# EAGLE board TubeClockBooster1.2 (EAGLE 6.4)
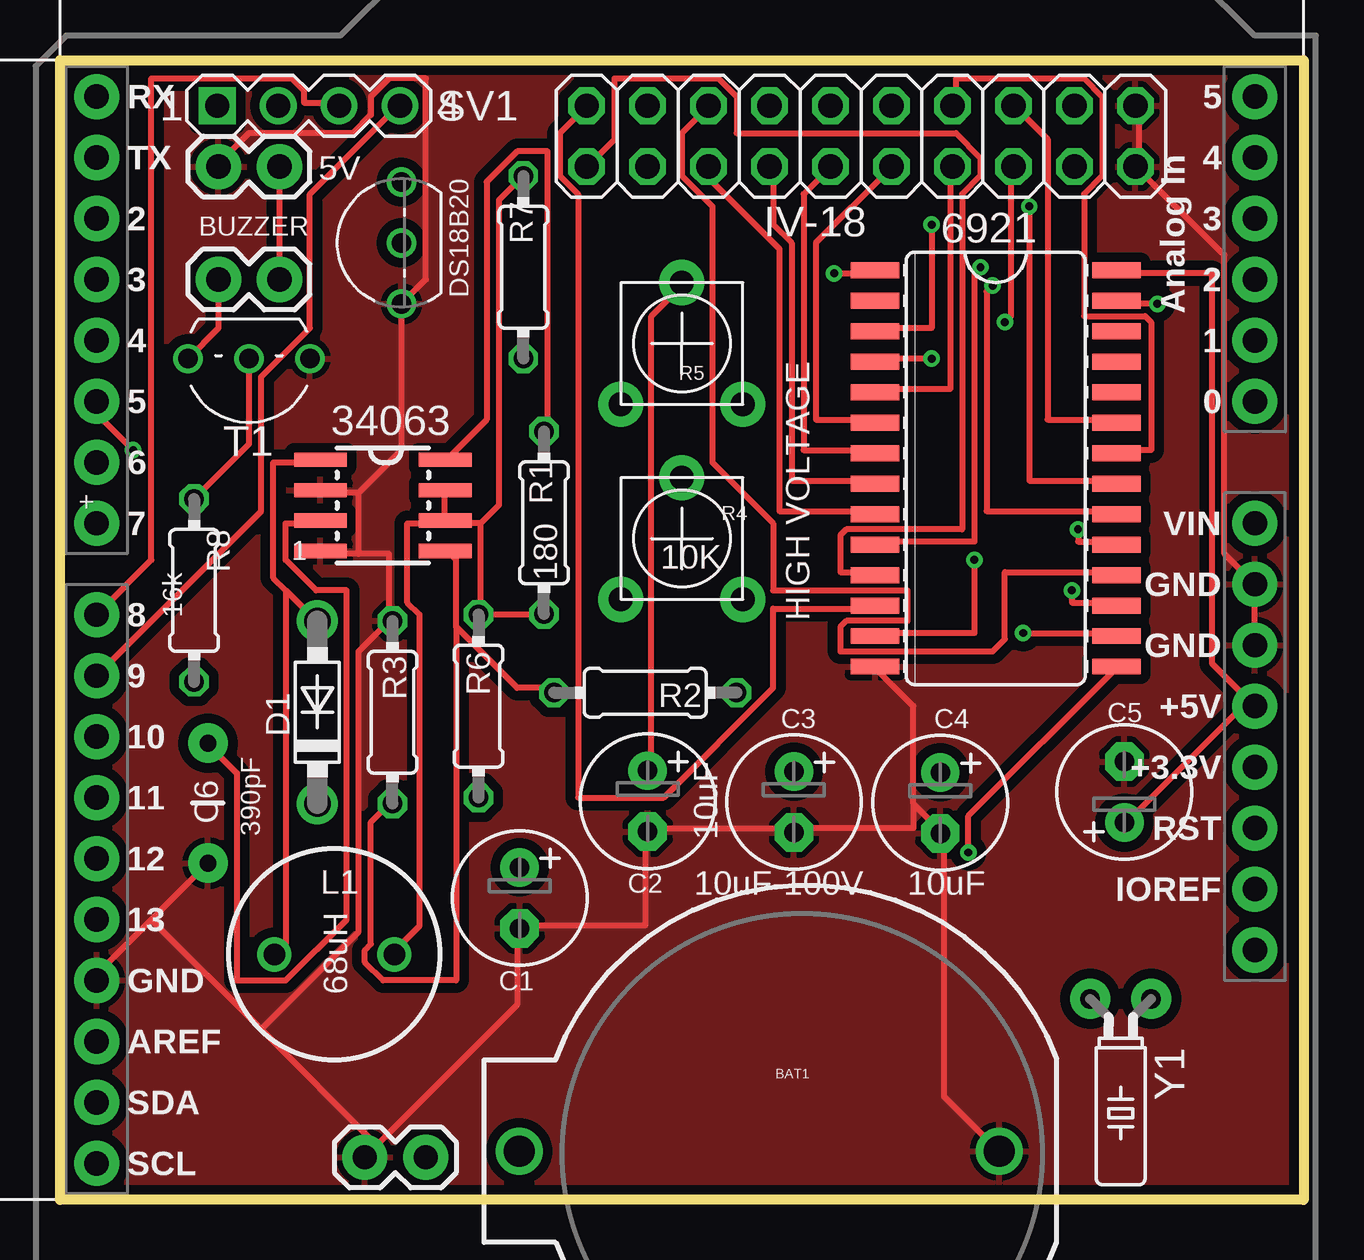
[diagram p0: board, top side]
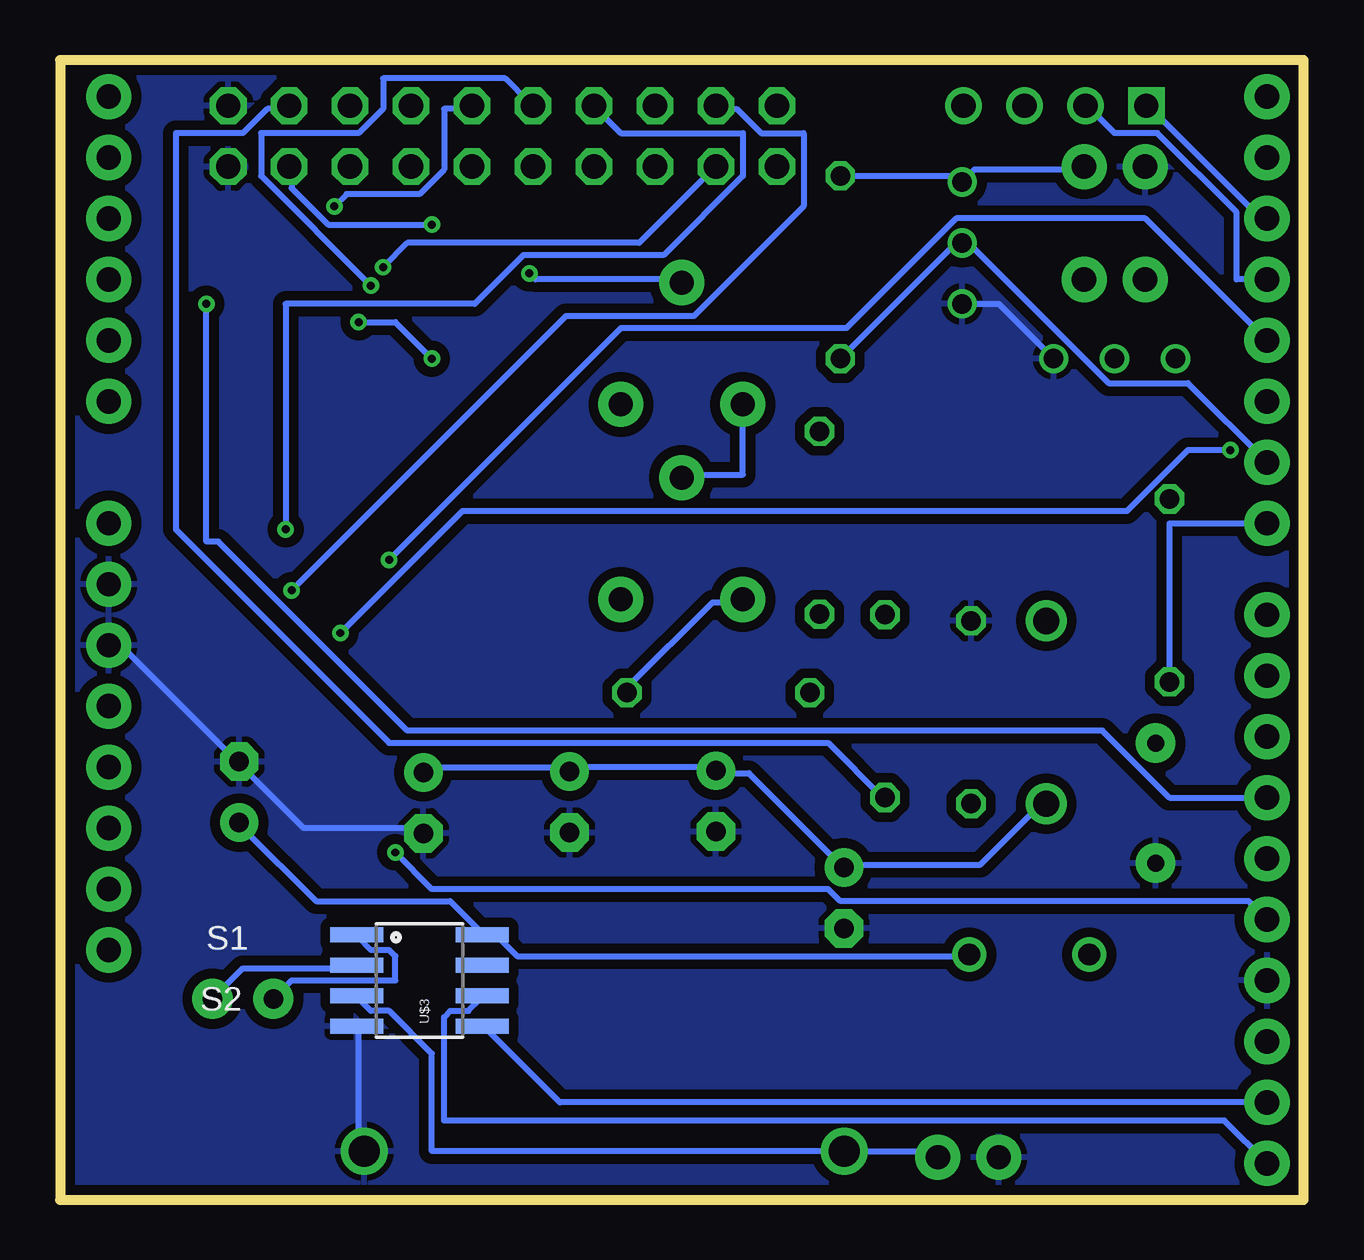
[diagram p1: board, bottom side, seen from below]

Size 51.82 x 47.5 mm. Coordinates in mm from the lower left corner, seen from the top.
Outline: 0,47.5 51.82,47.5 51.82,0 0,0 0,47.5
Copper layers (1*16): Top 0.0356mm / dielectric 1.5011mm / Bottom 0.0356mm
Design rules "LaenPCBOrder *": minimum track width 6mil, minimum drill 13mil, track to track 6mil, track to pad 6mil, pad to pad 6mil, via to via 6mil, smd to smd 6mil, copper to edge 15mil, drill to drill 6mil, minimum pad ring 7mil, minimum via ring 7mil, stop-mask expansion 3mil, vias tented up to drill 25mil, thermal gap 10mil
Net classes: 0 default: width 0.254 mm

## Footprints (pad centres in the part's own frame; a part is rotated, then mirrored left to right if it is on the bottom)
1X02 = drill 1.016 pad 1.88: 1 0,0; 2 2.54,0
SO28L = smd 0.66 x 2.032: 1 -8.255,-5.029; 2 -6.985,-5.029; 3 -5.715,-5.029; 4 -4.445,-5.029; 5 -3.175,-5.029; 6 -1.905,-5.029; 7 -0.635,-5.029; 8 0.635,-5.029; 9 1.905,-5.029; 10 3.175,-5.029; 11 4.445,-5.029; 12 5.715,-5.029; 13 6.985,-5.029; 14 8.255,-5.029; 15 8.255,5.029; 16 6.985,5.029; 17 5.715,5.029; 18 4.445,5.029; 19 3.175,5.029; 20 1.905,5.029; 21 0.635,5.029; 22 -0.635,5.029; 23 -1.905,5.029; 24 -3.175,5.029; 25 -4.445,5.029; 26 -5.715,5.029; 27 -6.985,5.029; 28 -8.255,5.029
SOIC8 = smd 0.6 x 2.2: 1 -1.905,-2.6; 2 -0.635,-2.6; 3 0.635,-2.6; 4 1.905,-2.6; 5 1.905,2.6; 6 0.635,2.6; 7 -0.635,2.6; 8 -1.905,2.6
BATTCOM_20MM_PTH = drill 1.3: 1 11.85,0; 2 -8.15,0
E2,5-6 = drill 0.813 pad 1.6: + -1.27,0 | drill 0.813 pad 1.6 octagon: - 1.27,0
CAP-PTH-5MM = drill 0.7 pad 1.651: 1 -2.5,0; 2 2.5,0
DO41-7.6 = drill 1.1 pad 1.7: A 3.81,0; C -3.81,0
TO92-CBE@1 = drill 0.813: 1 2.54,0; 2 0,0; 3 -2.54,0
2X10 = drill 1.016 octagon: 1 -11.43,-1.27; 2 -11.43,1.27; 3 -8.89,-1.27; 4 -8.89,1.27; 5 -6.35,-1.27; 6 -6.35,1.27; 7 -3.81,-1.27; 8 -3.81,1.27; 9 -1.27,-1.27; 10 -1.27,1.27; 11 1.27,-1.27; 12 1.27,1.27; 13 3.81,-1.27; 14 3.81,1.27; 15 6.35,-1.27; 16 6.35,1.27; 17 8.89,-1.27; 18 8.89,1.27; 19 11.43,-1.27; 20 11.43,1.27
6000-XXXX-RC = drill 0.9 pad 1.422: 1 -2.5,0; 2 2.5,0
0204/7 = drill 0.813 octagon: 1 -3.81,0; 2 3.81,0
TRIM_POT_PTH = drill 1 pad 1.88: 1 -2.54,-2.54; 2 0,2.54; 3 2.54,-2.54
MA04-1 = drill 1.016 square: 1 -3.81,0 | drill 1.016: 2 -1.27,0; 3 1.27,0; 4 3.81,0
TO92-EBC = drill 0.813: B 0,-1.27; C 2.54,-1.27; E -2.54,-1.27
UNO_R3_SHIELD = drill 1.016 pad 1.88: 3.3V 50.8,26.67; 5V 50.8,29.21; A0 50.8,41.91; A1 50.8,44.45; A2 50.8,46.99; A3 50.8,49.53; A4 50.8,52.07; A5 50.8,54.61; AREF 2.54,15.24; D2 2.54,49.53; D3 2.54,46.99; D4 2.54,44.45; D5 2.54,41.91; D6 2.54,39.37; D7 2.54,36.83; D8 2.54,33.02; D9 2.54,30.48; D10 2.54,27.94; D11 2.54,25.4; D12 2.54,22.86; D13 2.54,20.32; GND@0 50.8,31.75; GND@1 50.8,34.29; GND@2 2.54,17.78; IOREF 50.8,21.59; NC 50.8,19.05; RES 50.8,24.13; RX 2.54,54.61; SCL 2.54,10.16; SDA 2.54,12.7; TX 2.54,52.07; VIN 50.8,36.83
SO08 = smd 0.61 x 2.21: 1 -1.905,-2.616; 2 -0.635,-2.616; 3 0.635,-2.616; 4 1.905,-2.616; 5 1.905,2.616; 6 0.635,2.616; 7 -0.635,2.616; 8 -1.905,2.616
TC26HEZ = drill 0.813 pad 1.676: 1 -1.27,0; 2 1.27,0

## Placement (x,y rotation side)
5V  5vIN  [1X02]  9.14,43.05 180 top
6921  MAX6921_AFSOIC(W)  [SO28L]  38.99,30.48 270 top
34063  MC34063AD  [SOIC8]  13.45,28.94 270 top
BAT1  [BATTCOM_20MM_PTH]  30.99,2.03 180 top
BUZZER  [1X02]  9.14,38.35 180 top
BUZZER1  [1X02]  12.7,1.78 0 top
C1  10uF  [E2,5-6]  19.15,12.58 270 top
C2  10uF  [E2,5-6]  24.49,16.61 270 top
C3  10uF  [E2,5-6]  30.58,16.58 270 top
C4  10uF  [E2,5-6]  36.68,16.55 270 top
C5  100uF  [E2,5-6]  44.35,16.99 90 top
C6  390pF  [CAP-PTH-5MM]  6.17,16.53 270 top
D1  1N5819-B  [DO41-7.6]  10.72,20.32 90 top
DS18B20  DS18B20  [TO92-CBE@1]  14.22,39.88 90 top
IV-18  Booster Header  [2X10]  33.38,44.32 0 top
L1  68uH  [6000-XXXX-RC]  11.43,10.23 180 top
R1  180  [0204/7]  20.17,28.22 90 top
R2  22K  [0204/7]  24.38,21.13 0 top
R3  1K  [0204/7]  13.85,20.32 270 top
R4  10K  [TRIM_POT_PTH]  25.91,27.56 0 top
R5  10K  [TRIM_POT_PTH]  25.91,35.69 0 top
R6  22  [0204/7]  17.44,20.57 90 top
R7  4.7K  [0204/7]  19.3,38.86 270 top
R8  BASE  [0204/7]  5.59,25.4 90 top
SV1  [MA04-1]  10.36,45.59 0 top
T1  [TO92-EBC]  7.87,33.78 180 top
U$1  ARDUINO_R3_SHIELD  [UNO_R3_SHIELD]  -1.02,-8.64 0 top
U$3  DS1307SO8  [SO08]  36.83,9.14 270 bottom
Y1  [TC26HEZ]  44.2,8.38 180 top

## Library data of the parts
5V BUZZER BUZZER1 DS18B20 T1 = BergCustom
6921 = maxim_modified
34063 = mc34063
BAT1 = SparkFun-Electromechanical
C1-C5 L1 R1-R3 R6-R8 = rcl
C6 = SparkFun-Capacitors
D1 = diode
IV-18 = pinhead
R4 R5 = SparkFun
SV1 = BergCustom; OC_FARNELL: unknown; OC_NEWARK: unknown
U$1 = SparkFun-Boards
U$3 Y1 = SparkFun-FreqCtrl

## Nets
+5V: 5V.1 6921.28 34063.6 34063.7 BUZZER.1 C5.+ DS18B20.1 L1.1 R1.1 R6.2 R7.1 U$1.5V U$3.8
BLANK: 6921.13 U$1.D4
BUZZER: R8.1 U$1.D7
CLK: 6921.15 U$1.D13
GND: 5V.2 6921.14 34063.2 34063.4 BAT1.2 BUZZER1.1 C1.- C2.- C3.- C4.- C5.- C6.2 DS18B20.3 IV-18.19 IV-18.20 R3.1 T1.E U$1.GND@0 U$1.GND@1 U$1.GND@2 U$3.4
LOAD: 6921.16 U$1.D5
N$1: IV-18.18 R6.1
N$2: R2.2 R4.1
N$3: 34063.1 D1.A L1.2
N$4: R4.2 R5.1
N$5: 34063.8 R1.2
N$6: 34063.3 C6.1
N$7: 34063.5 R2.1 R3.2
N$8: R8.2 T1.B
N$9: SV1.1 U$1.D2
N$10: SV1.2 U$1.D3
N$11: SV1.3 U$1.D8
N$12: BUZZER.2 T1.C
N$13: U$3.1 Y1.2
N$14: U$3.2 Y1.1
N$15: U$1.SCL U$3.6
N$16: BAT1.1 BUZZER1.2 U$3.3
N$17: U$1.SDA U$3.5
N$18: SV1.4 U$1.D9
ONEWIRE: DS18B20.2 R7.2 U$1.D6
OUT3: 6921.23 IV-18.16
OUT4: 6921.22 IV-18.14
OUT5: 6921.21 IV-18.12
OUT6: 6921.20 IV-18.10
OUT7: 6921.19 IV-18.8
OUT8: 6921.18 IV-18.6
OUT9: 6921.17 IV-18.4
OUT10: 6921.12 IV-18.2
OUT11: 6921.11 IV-18.1
OUT12: 6921.10 IV-18.3
OUT13: 6921.9 IV-18.5
OUT14: 6921.8 IV-18.7
OUT15: 6921.7 IV-18.9
OUT16: 6921.6 IV-18.11
OUT17: 6921.5 IV-18.13
OUT18: 6921.4 IV-18.15
OUT19: 6921.3 IV-18.17
SIMO: 6921.27 U$1.D11
VBB: 6921.1 C1.+ C2.+ C3.+ C4.+ D1.C R5.2

## Tracks (layer width: path | path; a pad name or v marks a point on that pad's centre or on a via)
+5V
  Top 0.254: 34063.6 16,28.45 16,29.46 34063.7 | 17.53,24.38 20.07,24.38 R1.1 | 17.53,28.19 16.26,28.19 34063.6 | 17.53,24.38 17.53,28.19 | 17.53,24.38 R6.2 | 5V.1 BUZZER.1 | 17.53,28.19 18.29,28.96 18.29,41.66 R7.1 | 49.53,20.83 48.01,22.35 48.01,38.61 44.2,38.61 6921.28 | 49.53,20.83 44.45,15.75 C5.+ | 49.53,20.83 U$1.5V | 34063.6 16,28.19 14.48,28.19 14.48,24.89 14.99,24.38 14.99,11.43 13.97,10.41 L1.1
  Bottom 0.254: R7.1 14.48,42.67 DS18B20.1 13.72,42.93 9.14,42.93 5V.1 | C5.+ 44.2,15.49 41.15,12.45 35.56,12.45 34.29,11.18 U$3.8 34.04,10.92 33.53,10.92 32.77,10.16 13.97,10.16 L1.1
BLANK  (via drill 0.33)
  Top 0.254: v38.1,26.67 38.1,23.62 34.04,23.62 6921.13
  Bottom 0.254: v38.1,26.67 28.45,36.32 19.05,36.32 14.48,40.89 6.6,40.89 U$1.D4
BUZZER
  Bottom 0.254: R8.1 5.59,28.19 U$1.D7
CLK  (via drill 0.33)
  Top 0.254: v37.85,14.48 37.85,16 43.94,22.1 6921.15
  Bottom 0.254: v37.85,14.48 36.32,12.95 19.81,12.95 19.3,12.45 2.29,12.45 U$1.D13
GND
  Top 0.254: IV-18.20 44.96,45.47 44.96,43.18 IV-18.19 44.96,42.93 48.51,39.37 48.51,26.92 U$1.GND@1 U$1.GND@0 | 35.56,16.51 35.56,20.57 34.04,22.1 6921.14 | 35.56,16.51 36.58,15.49 C4.- 36.83,15.24 36.83,4.32 39.12,2.03 BAT1.2 | 35.56,16.51 35.56,15.49 30.73,15.49 C3.- 30.48,15.49 24.64,15.49 C2.- 24.38,15.24 24.38,11.43 19.3,11.43 C1.- 19.05,11.18 19.05,8.13 13.21,2.29 | 12.45,26.92 13.72,26.92 13.72,24.13 | 12.45,26.92 10.92,26.92 34063.4 | 12.45,29.46 10.92,29.46 34063.2 | 12.45,26.92 12.45,29.46 | 5V.2 6.6,43.18 7.87,44.45 12.19,44.45 12.95,45.21 12.95,45.97 13.72,46.74 15.24,46.74 15.24,38.35 DS18B20.3 14.22,31.24 12.45,29.46 | 3.81,11.68 1.52,9.4 U$1.GND@2 | 3.81,11.68 6.1,13.97 C6.2 | 13.21,2.29 8.38,7.11 | 8.38,7.11 3.81,11.68 | 13.21,2.29 BUZZER1.1 | 13.72,24.13 12.45,22.86 12.45,11.18 8.38,7.11 | 13.72,24.13 R3.1
  Bottom 0.254: U$1.GND@0 49.28,23.11 44.45,18.29 C5.- 44.2,18.03 41.66,15.49 36.83,15.49 C4.- | U$3.4 39.37,7.11 39.37,2.03 BAT1.2 | T1.E 12.7,37.34 DS18B20.3
  pour Bottom (isolate 0.406): 0.25,47.5 -0.55,-1.78 52.03,-1.81 51.82,47.46
  pour Top (isolate 0.406): 51.82,-6.1 -0.29,-5.84 -0.04,47.21 51.82,47.72
LOAD  (via drill 0.33)
  Top 0.254: v40.13,23.62 43.94,23.62 6921.16 | v3.05,31.24 1.52,32.77 U$1.D5
  Bottom 0.254: v40.13,23.62 35.05,28.7 7.37,28.7 4.83,31.24 v3.05,31.24
N$1
  Bottom 0.254: R6.1 17.53,16.76 19.81,19.05 38.1,19.05 46.99,27.94 46.99,44.45 44.2,44.45 43.18,45.47 42.42,45.47 IV-18.18
N$2
  Bottom 0.254: R2.2 28.19,21.34 24.64,24.89 23.37,24.89 R4.1
N$3
  Top 0.254: 9.4,25.4 10.67,24.13 D1.A | 9.4,25.4 8.89,25.91 8.89,30.73 10.67,30.73 34063.1 | 9.4,25.4 9.4,10.67 9.14,10.41 L1.2
N$4
  Bottom 0.254: R5.1 23.37,30.23 25.91,30.23 R4.2
N$5
  Top 0.254: 34063.8 16.26,30.99 17.78,32.51 17.78,42.42 19.05,43.69 20.32,43.69 20.32,32.26 R1.2
N$6
  Top 0.254: 34063.3 10.67,28.19 9.4,28.19 9.4,26.67 10.67,25.4 11.94,25.4 11.94,11.68 9.4,9.14 7.37,9.14 7.37,17.78 6.35,18.8 C6.1
N$7
  Top 0.254: 16.51,23.88 16.51,26.67 16.26,26.92 34063.5 | 16.51,23.88 19.05,21.34 20.57,21.34 R2.1 | 16.51,23.88 16.51,9.14 13.46,9.14 12.7,9.91 12.7,10.41 12.95,10.67 12.95,15.75 13.72,16.51 R3.2
N$8
  Top 0.254: R8.2 7.87,31.5 T1.B
N$9
  Bottom 0.254: U$1.D2 1.78,40.89 6.35,45.47 SV1.1
N$10
  Bottom 0.254: U$1.D3 2.79,38.35 2.79,41.15 6.1,44.45 7.87,44.45 8.89,45.47 SV1.2
N$11
  Top 0.254: U$1.D8 3.81,26.67 3.81,46.74 9.65,46.74 10.16,46.23 10.16,45.72 11.43,45.72 SV1.3
N$12
  Top 0.254: T1.C 6.6,36.32 BUZZER.2
N$13
  Bottom 0.254: Y1.2 42.16,9.14 37.85,9.14 37.85,10.16 38.1,10.41 38.86,10.41 39.37,10.92 U$3.1
N$14
  Bottom 0.254: Y1.1 44.2,9.65 39.62,9.65 U$3.2
N$15
  Bottom 0.254: U$1.SCL 3.3,3.3 35.81,3.3 35.81,7.62 35.56,7.87 34.8,7.87 34.29,8.38 U$3.6
N$16
  Bottom 0.254: U$3.3 39.37,8.38 38.86,7.87 38.1,7.87 36.32,6.1 36.32,2.03 BAT1.1 15.49,2.03 BUZZER1.2
N$17
  Bottom 0.254: U$1.SDA 30.99,4.06 34.04,7.11 U$3.5
N$18
  Top 0.254: U$1.D9 8.38,28.7 8.38,34.29 10.41,36.32 10.41,41.91 13.97,45.47 SV1.4
ONEWIRE
  Bottom 0.254: R7.2 14.48,39.88 DS18B20.2 13.97,39.88 8.13,34.04 4.83,34.04 U$1.D6
OUT3
  Top 0.254: 6921.23 43.94,32.51 41.15,32.51 41.15,44.2 39.88,45.47 IV-18.16
OUT4
  Top 0.254: 6921.22 44.2,31.24 45.47,31.24 45.47,36.58 45.21,36.83 42.67,36.83 42.67,41.91 43.43,42.67 43.43,45.97 42.67,46.74 37.34,46.74 37.34,45.72 IV-18.14
OUT5  (via drill 0.33)
  Top 0.254: v40.39,41.4 40.39,29.97 43.94,29.97 6921.21
  Bottom 0.254: v40.39,41.4 39.88,41.91 36.83,41.91 35.81,42.93 35.81,45.47 34.8,45.47 IV-18.12
OUT6  (via drill 0.33)
  Top 0.254: v38.86,38.1 38.61,37.85 38.61,28.7 43.94,28.7 6921.20
  Bottom 0.254: v38.86,38.1 43.43,42.67 43.43,44.45 39.37,44.45 38.35,45.47 38.35,46.74 33.27,46.74 32.26,45.72 IV-18.10
OUT7  (via drill 0.33)
  Top 0.254: v42.42,27.94 42.42,27.43 43.94,27.43 6921.19
  Bottom 0.254: v42.42,27.94 42.42,37.34 34.54,37.34 32.51,39.37 26.67,39.37 23.37,42.67 23.37,44.45 28.45,44.45 29.46,45.47 IV-18.8
OUT8
  Top 0.254: 6921.18 43.94,26.16 39.37,26.16 39.37,23.37 38.86,22.86 32.51,22.86 32.51,23.88 32.77,24.13 35.31,24.13 35.31,25.4 29.72,25.4 29.72,28.19 27.18,30.73 27.18,41.4 25.91,42.67 25.91,44.45 26.92,45.47 IV-18.6
OUT9  (via drill 0.33)
  Top 0.254: v42.16,25.4 42.16,24.89 43.94,24.89 6921.17
  Bottom 0.254: v42.16,25.4 30.73,36.83 25.4,36.83 20.83,41.4 20.83,44.45 22.61,44.45 23.62,45.47 24.38,45.47 IV-18.4
OUT10
  Top 0.254: 6921.12 33.78,24.64 29.72,24.64 29.72,21.34 25.15,16.76 21.59,16.76 21.59,41.91 20.83,42.67 20.83,44.45 21.84,45.47 IV-18.2
OUT11
  Top 0.254: 6921.11 33.78,26.16 32.51,26.16 32.51,27.69 32.77,27.94 37.59,27.94 37.59,41.91 38.35,42.67 38.35,43.43 37.34,44.45 28.19,44.45 28.19,45.97 27.43,46.74 23.11,46.74 23.11,44.2 22.1,43.18 IV-18.1
OUT12  (via drill 0.33)
  Top 0.254: v38.35,38.86 38.1,38.61 38.1,27.43 34.04,27.43 6921.10
  Bottom 0.254: v38.35,38.86 37.34,39.88 27.69,39.88 24.64,42.93 IV-18.3
OUT13
  Top 0.254: 6921.9 33.78,28.7 29.97,28.7 29.97,39.62 27.18,42.42 27.18,42.93 IV-18.5
OUT14
  Top 0.254: 6921.8 33.78,29.97 30.48,29.97 30.48,39.88 29.72,40.64 29.72,42.93 IV-18.7
OUT15
  Top 0.254: 6921.7 33.78,31.24 30.99,31.24 30.99,41.91 32,42.93 IV-18.9
OUT16
  Top 0.254: 6921.6 33.78,32.51 31.5,32.51 31.5,39.88 34.54,42.93 IV-18.11
OUT17
  Top 0.254: 6921.5 34.04,33.78 37.08,33.78 37.08,42.93 IV-18.13
OUT18  (via drill 0.33)
  Top 0.254: v36.32,35.05 34.04,35.05 6921.4 | v39.37,36.58 39.62,36.83 39.62,42.93 IV-18.15
  Bottom 0.254: v36.32,35.05 37.85,36.58 v39.37,36.58
OUT19  (via drill 0.33)
  Top 0.254: v36.32,40.64 36.32,36.32 34.04,36.32 6921.3
  Bottom 0.254: v36.32,40.64 40.64,40.64 42.16,42.16 42.16,42.93 IV-18.17
SIMO  (via drill 0.33)
  Top 0.254: v45.72,37.34 44.2,37.34 6921.27
  Bottom 0.254: v45.72,37.34 45.72,27.43 45.21,27.43 37.34,19.56 8.38,19.56 5.59,16.76 U$1.D11
VBB  (via drill 0.33)
  Top 0.254: v32.26,38.61 33.78,38.61 6921.1 | R5.2 25.91,38.1 24.64,36.83 24.64,18.03 C2.+
  Bottom 0.254: v32.26,38.61 32,38.35 25.91,38.35 R5.2 | C4.+ 36.58,18.03 30.73,18.03 C3.+ 30.48,18.03 24.64,18.03 C2.+ 24.38,17.78 23.11,17.78 19.3,13.97 C1.+ 19.05,13.97 13.46,13.97 10.92,16.51 D1.C

## Text on the board
tNames: + | 1 | HIGH VOLTAGE | ~16k | 10uF-100V | 10uF
bNames: S1 | S2